# Altium PCB IOT_CPU_v0.PcbDoc (part 1 of 2)
Units mil, origin at the board's own origin, x right, y up, seen from the top; angles counter-clockwise.
Board outline 3866.14 x 1661.42 mil, 4 copper layers (Top Layer, Top, Bottom Layer, Bottom, Mid-Layer 2, GND, Mid-Layer 1, +3.3V); 132 components, 138 nets, 669 pads, 214 vias.
Unrouted connection lines stored in the file: 63.
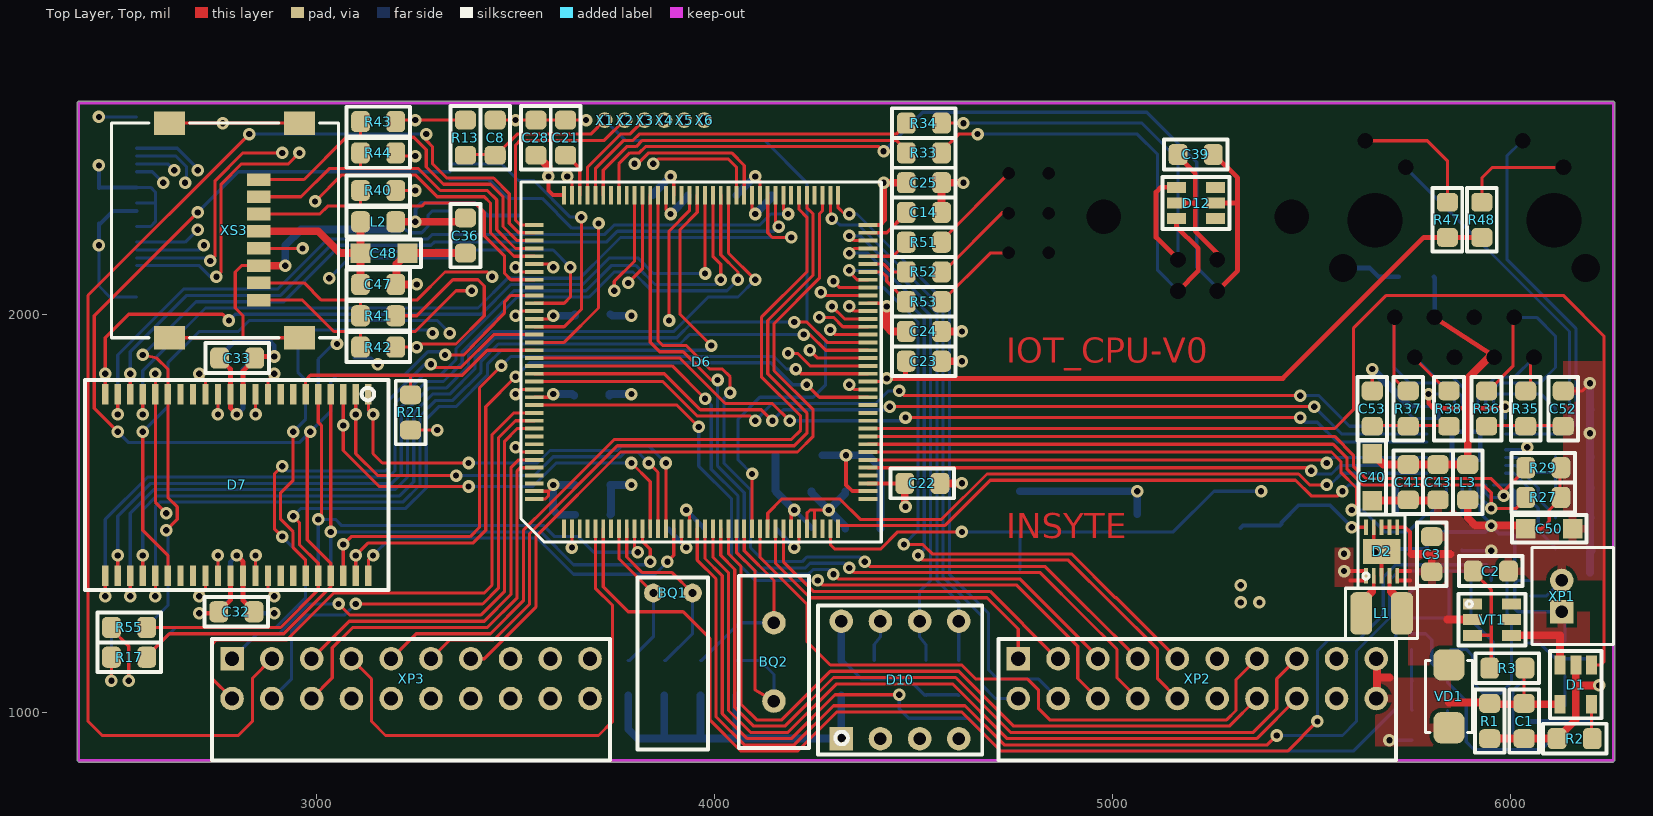
[diagram p0: Top Layer, Top view]
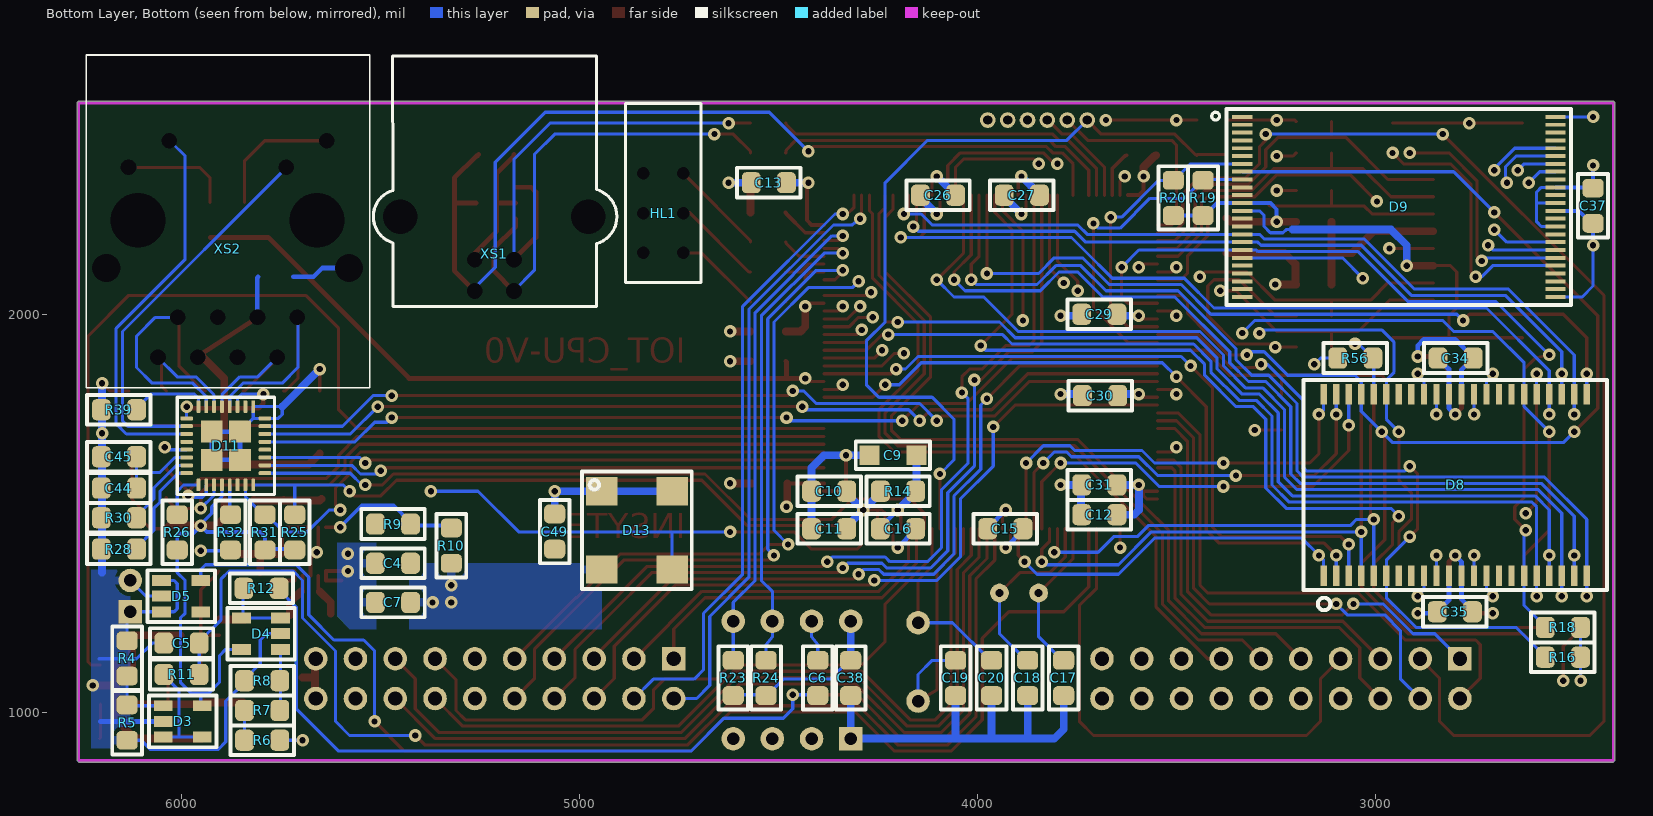
[diagram p1: Bottom Layer, Bottom view, seen from below]
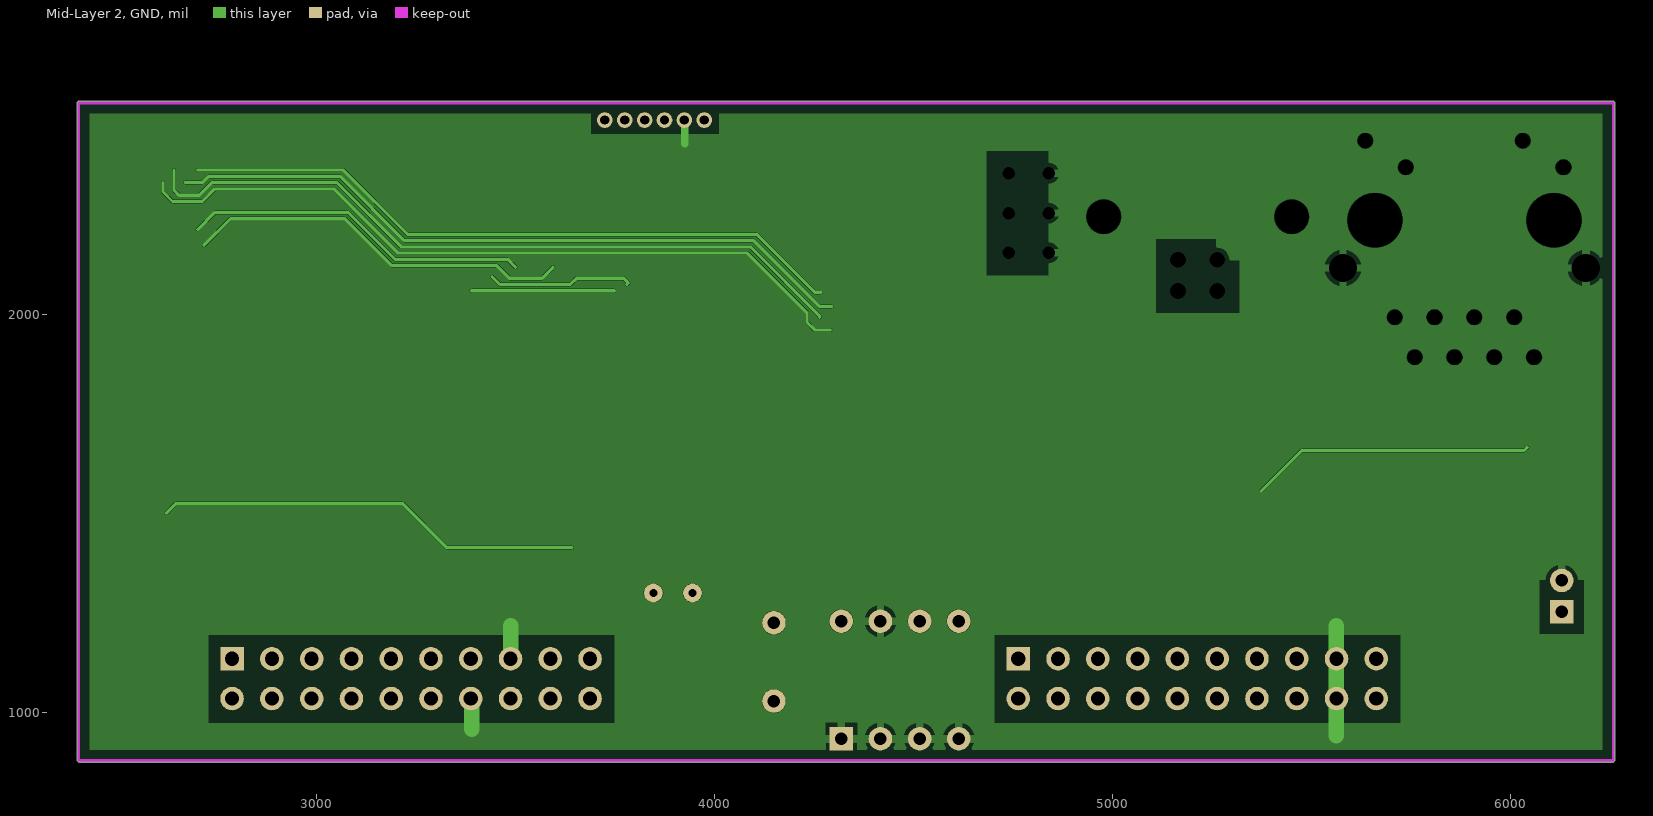
[diagram p2: Mid-Layer 2, GND]
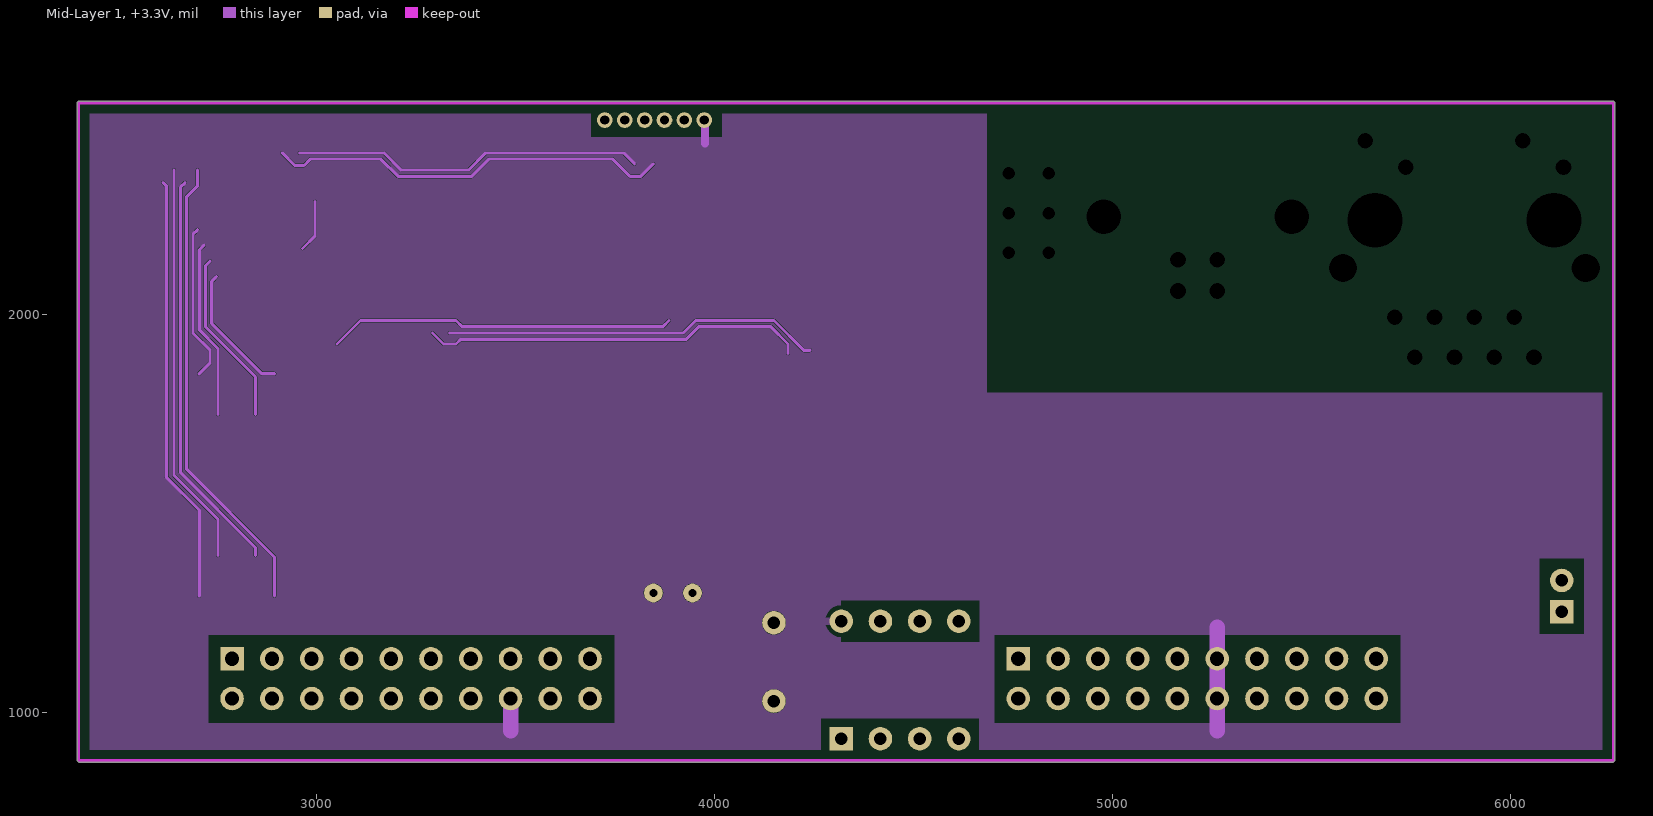
[diagram p3: Mid-Layer 1, +3.3V]

## Layer stack, top to bottom
Top Solder, Top Mask: solder mask 0.4, Solder Resist, Dk 3.5
Top Layer, Top: signal copper 1.4
Dielectric 1: dielectric 12.6, FR-4, Dk 4.8
Bottom Layer, Bottom: signal copper 1.4
Mid-Layer 2, GND: signal copper 1.4
Dielectric2: dielectric 12.6, FR-4, Dk 4.8
Mid-Layer 1, +3.3V: signal copper 1.4
Dielectric3: dielectric 12.6, FR-4, Dk 4.8
Bottom Solder, Bot Mask: solder mask 0.4, Solder Resist, Dk 3.5

## Board outline
2397.64,877.95 2401.57,874.02 6259.84,874.02 6263.78,877.95 6263.78,2531.5 6259.84,2535.43 2401.57,2535.43 2397.64,2531.5

## Design rules (kind name [scope] priority, off if disabled: settings)
Clearance "Clearance_Top Layer, Top" [ExistsOnLayer('Top Layer, Top') vs ExistsOnLayer('Top Layer, Top')] p1: gap=0.25 except(7.87: Arc-Arc Arc-Track Arc-THPad Arc-Via Track-Track Track-THPad Track-Via THPad-THPad THPad-Via Via-Via)
Clearance "Clearance_Bottom Layer, Bottom" [ExistsOnLayer('Bottom Layer, Bottom') vs ExistsOnLayer('Bottom Layer, Bottom')] p2: gap=0.25 except(7.87: Arc-Arc Arc-Track Arc-THPad Arc-Via Track-Track Track-THPad Track-Via THPad-THPad THPad-Via Via-Via)
Clearance "Clearance_Mid-Layer 2, GND" [ExistsOnLayer('Mid-Layer 2, GND') vs ExistsOnLayer('Mid-Layer 2, GND')] p3: gap=0.25 except(7.87: Arc-Arc Arc-Track Arc-THPad Arc-Via Track-Track Track-THPad Track-Via THPad-THPad THPad-Via Via-Via)
Clearance "Clearance_Mid-Layer 1, +3.3V" [ExistsOnLayer('Mid-Layer 1, +3.3V') vs ExistsOnLayer('Mid-Layer 1, +3.3V')] p4: gap=0.25 except(7.87: Arc-Arc Arc-Track Arc-THPad Arc-Via Track-Track Track-THPad Track-Via THPad-THPad THPad-Via Via-Via)
Clearance [All] p5: gap=0.25
ComponentClearance ComponentClearance_Design [All] p1: gap=0.5 collisioncheckmode=3 verticalgap=0.5 showdistances=FALSE
ComponentClearance [All] p2: gap=10 collisioncheckmode=3 verticalgap=10 showdistances=FALSE
PlaneClearance [All] p1: clearance=10
PolygonConnect PolygonConnect_18 [IsPolygon And InNet('+3,3V') And OnLayer('Mid-Layer 1, +3.3V') vs IsVia] p1: connectstyle=Direct reliefconductorwidth=15 reliefentries=4 polygonreliefangle="90 Angle" airgapwidth=10
PolygonConnect PolygonConnect_17 [IsPolygon And InNet('+3,3V') And OnLayer('Mid-Layer 1, +3.3V') vs IsPad] p2: connectstyle=Relief reliefconductorwidth=19.68 reliefentries=4 polygonreliefangle="90 Angle" airgapwidth=10
PolygonConnect PolygonConnect_16 [IsPolygon And InNet('GND') And OnLayer('Mid-Layer 2, GND') vs IsVia] p3: connectstyle=Direct reliefconductorwidth=15 reliefentries=4 polygonreliefangle="90 Angle" airgapwidth=10
PolygonConnect PolygonConnect_15 [IsPolygon And InNet('GND') And OnLayer('Mid-Layer 2, GND') vs IsPad] p4: connectstyle=Relief reliefconductorwidth=19.68 reliefentries=4 polygonreliefangle="90 Angle" airgapwidth=10
PolygonConnect PolygonConnect_14 [IsPolygon And InNet('GND') And OnLayer('Bottom Layer, Bottom') vs IsVia] p5: connectstyle=Direct reliefconductorwidth=15 reliefentries=4 polygonreliefangle="90 Angle" airgapwidth=10
PolygonConnect PolygonConnect_13 [IsPolygon And InNet('GND') And OnLayer('Bottom Layer, Bottom') vs IsPad] p6: connectstyle=Relief reliefconductorwidth=19.68 reliefentries=4 polygonreliefangle="90 Angle" airgapwidth=10
PolygonConnect PolygonConnect_12 [IsPolygon And InNet('+3,3V') And OnLayer('Bottom Layer, Bottom') vs IsVia] p7: connectstyle=Direct reliefconductorwidth=15 reliefentries=4 polygonreliefangle="90 Angle" airgapwidth=10
PolygonConnect PolygonConnect_11 [IsPolygon And InNet('+3,3V') And OnLayer('Bottom Layer, Bottom') vs IsPad] p8: connectstyle=Relief reliefconductorwidth=19.68 reliefentries=4 polygonreliefangle="90 Angle" airgapwidth=10
PolygonConnect PolygonConnect_10 [IsPolygon And InNet('GND') And OnLayer('Top Layer, Top') vs IsVia] p9: connectstyle=Direct reliefconductorwidth=15 reliefentries=4 polygonreliefangle="90 Angle" airgapwidth=10
PolygonConnect PolygonConnect_9 [IsPolygon And InNet('GND') And OnLayer('Top Layer, Top') vs IsPad] p10: connectstyle=Relief reliefconductorwidth=19.68 reliefentries=4 polygonreliefangle="90 Angle" airgapwidth=10
PolygonConnect PolygonConnect_8 [IsPolygon And InNet('+5V') And OnLayer('Top Layer, Top') vs IsVia] p11: connectstyle=Direct reliefconductorwidth=15 reliefentries=4 polygonreliefangle="90 Angle" airgapwidth=10
PolygonConnect PolygonConnect_7 [IsPolygon And InNet('+5V') And OnLayer('Top Layer, Top') vs IsPad] p12: connectstyle=Relief reliefconductorwidth=19.68 reliefentries=4 polygonreliefangle="90 Angle" airgapwidth=10
PolygonConnect PolygonConnect_6 [IsPolygon And InNet('NET00001') And OnLayer('Top Layer, Top') vs IsVia] p13: connectstyle=Direct reliefconductorwidth=15 reliefentries=4 polygonreliefangle="90 Angle" airgapwidth=10
PolygonConnect PolygonConnect_5 [IsPolygon And InNet('NET00001') And OnLayer('Top Layer, Top') vs IsPad] p14: connectstyle=Relief reliefconductorwidth=19.68 reliefentries=4 polygonreliefangle="90 Angle" airgapwidth=10
PolygonConnect PolygonConnect_4 [IsPolygon And InNet('NET00002') And OnLayer('Top Layer, Top') vs IsVia] p15: connectstyle=Direct reliefconductorwidth=15 reliefentries=4 polygonreliefangle="90 Angle" airgapwidth=10
PolygonConnect PolygonConnect_3 [IsPolygon And InNet('NET00002') And OnLayer('Top Layer, Top') vs IsPad] p16: connectstyle=Relief reliefconductorwidth=19.68 reliefentries=4 polygonreliefangle="90 Angle" airgapwidth=10
PolygonConnect PolygonConnect_2 [IsPolygon And InNet('+3,3V') And OnLayer('Top Layer, Top') vs IsVia] p17: connectstyle=Direct reliefconductorwidth=15 reliefentries=4 polygonreliefangle="90 Angle" airgapwidth=10
PolygonConnect PolygonConnect_1 [IsPolygon And InNet('+3,3V') And OnLayer('Top Layer, Top') vs IsPad] p18: connectstyle=Relief reliefconductorwidth=19.68 reliefentries=4 polygonreliefangle="90 Angle" airgapwidth=10
PolygonConnect [All] p19: connectstyle=Relief reliefconductorwidth=10 reliefentries=4 polygonreliefangle="90 Angle" airgapwidth=10
RoutingVias [All] p1: holewidth=28 width=50 viastyle="Through Hole" minholewidth=28 minwidth=50 maxholewidth=28 maxwidth=50
SolderMaskExpansion [All] p1: expansion=4
Width [All] p1: maxlimit=10 minlimit=10 preferedwidth=10
28 further rules are at their usual default settings.

## Components (designator, comment, footprint, x,y, rotation, side; value= is the part's Value field where it differs from the comment)
BQ1 "32,768кГц" DT38_Primary 3944.88,1299.21 r180 top
BQ2 "25МГц" HC49U_vert 4149.61,1224.41 r270 top
C1 "2,2" 0805 6035.43,933.07 r90 top
C2 "560" 0805 5996.06,1354.33 r180 top
C3 "10,0" 0805 5803.15,1440.94 r270 top
C4 "10,0" 0805 5425.2,1374.02 r0 bottom
C5 "560" 0805 5956.69,1173.23 r0 bottom
C6 "560" 0805 4401.57,1129.92 r270 bottom
C7 "10,0" 0805 5425.2,1275.59 r0 bottom
C8 "2,2" 0805 3448.82,2488.19 r270 top
C9 "22,0" TANTAL_A3216 4153.54,1645.67 r0 bottom
C10 "10,0" 0805 4417.32,1555.12 r180 bottom
C11 "0,1" 0805 4417.32,1460.63 r180 bottom
C12 "10,0" 0805 3649.61,1496.06 r0 bottom
C13 "10,0" 0805 4480.31,2330.71 r0 bottom
C14 "2,2" 0805 4570.87,2255.91 r180 top
C15 "0,1" 0805 3885.83,1460.63 r0 bottom
C16 "0,1" 0805 4244.09,1460.63 r180 bottom
C17 "22" 0805 3783.46,1129.92 r270 bottom
C18 "22" 0805 3874.02,1129.92 r270 bottom
C19 "22" 0805 4055.12,1129.92 r270 bottom
C20 "22" 0805 3964.57,1129.92 r270 bottom
C21 "2,2" 0805 3625.98,2488.19 r270 top
C22 "0,1" 0805 4566.93,1574.8 r180 top
C23 "0,1" 0805 4570.87,1881.89 r180 top
C24 "0,1" 0805 4570.87,1956.69 r180 top
C25 "0,1" 0805 4570.87,2330.71 r180 top
C26 "0,1" 0805 4055.12,2299.21 r0 bottom
C27 "0,1" 0805 3933.07,2299.21 r180 bottom
C28 "0,1" 0805 3551.18,2488.19 r270 top
C29 "0,1" 0805 3649.61,2000 r0 bottom
C30 "0,1" 0805 3736.22,1795.28 r180 bottom
C31 "0,1" 0805 3649.61,1570.87 r0 bottom
C32 "0,1" 0805 2842.52,1251.97 r180 top
C33 "0,1" 0805 2755.91,1889.76 r0 top
C34 "0,1" 0805 2842.52,1889.76 r180 bottom
C35 "0,1" 0805 2755.91,1251.97 r0 bottom
C36 "0,1" 0805 3374.02,2153.54 r90 top
C37 "0,1" 0805 2452.76,2228.35 r90 bottom
C38 "0,1" 0805 4318.9,1129.92 r270 bottom
C39 "0,1" 0805 5165.35,2401.57 r0 top
C40 "22,0" TANTAL_A3216 5653.54,1649.61 r270 top
C41 "2,2" 0805 5744.09,1622.05 r270 top
C43 "0,1" 0805 5818.9,1622.05 r270 top
C44 "0,1" 0805 6114.17,1562.99 r0 bottom
C45 "2,2" 0805 6114.17,1641.73 r0 bottom
C47 "0,1" 0805 3110.24,2074.8 r0 top
C48 "22,0" TANTAL_A3216 3110.24,2153.54 r0 top
C49 "0,1" 0805 5062.99,1409.45 r90 bottom
C50 "22,0" TANTAL_A3216 6039.37,1460.63 r0 top
C52 "0,1" 0805 6133.86,1807.09 r270 top
C53 "0,1" 0805 5653.54,1807.09 r270 top
D1 "{Value}" SOT-23-5 6204.72,1118.11 r270 top
D2 "{Value}" VSON-10 5637.8,1342.52 r90 top
D3 "{Value}" SOT-23-5 6047.24,1015.75 r180 bottom
D4 "{Value}" SOT-23-5 5751.97,1157.48 r0 bottom
D5 "{Value}" SOT-23-5 6051.18,1330.71 r180 bottom
D6 "" LQFP-144 3622.05,1460.63 r90 top
D7 "{Value}" TSOP-44 3129.92,1799.21 r270 top
D8 "{Value}" TSOP-44 3129.92,1342.52 r90 bottom
D9 "{Value}" TSSOP2-48 3334.65,2496.06 r180 bottom
D10 "DIP socket 1-2199298-2" DIP-08 4318.9,933.07 r90 top
D11 "{Value}" QFN-32-5X5 5889.76,1669.29 r180 bottom
D12 "{Value}" SOT-23-6 5161.42,2318.9 r0 top
D13 "" SG0705 4944.88,1555.12 r270 bottom
HL1 "" L-7104SA-3GD 4740.16,2354.33 r270 bottom
L1 "3,3мкГн" SRN3015 5728.35,1248.03 r180 top
L2 "BLM21BD601SN1D" 0805 3110.24,2232.28 r0 top
L3 "BLM21BD601SN1D" 0805 5893.7,1622.05 r270 top
R1 "100к" 0805 5948.82,933.07 r90 top
R2 "10к" 0805 6118.11,933.07 r0 top
R3 "10к" 0805 5948.82,1110.24 r0 top
R4 "1M" 0805 6137.8,1090.55 r90 bottom
R5 "1M" 0805 6137.8,929.13 r90 bottom
R6 "1M" 0805 5842.52,929.13 r180 bottom
R7 "1M" 0805 5842.52,1003.94 r180 bottom
R8 "1M" 0805 5842.52,1078.74 r180 bottom
R9 "1M" 0805 5425.2,1472.44 r0 bottom
R10 "180к" 0805 5322.83,1374.02 r90 bottom
R11 "620" 0805 5956.69,1094.49 r0 bottom
R12 "620" 0805 5755.91,1311.02 r0 bottom
R13 "10к" 0805 3374.02,2488.19 r270 top
R14 "22" 0805 4244.09,1555.12 r180 bottom
R16 "10к" 0805 2484.25,1137.8 r0 bottom
R17 "10к" 0805 2484.25,1137.8 r0 top
R18 "10к" 0805 2484.25,1212.6 r0 bottom
R19 "10к" 0805 3433.07,2248.03 r90 bottom
R20 "10к" 0805 3507.87,2248.03 r90 bottom
R21 "10к" 0805 3236.22,1708.66 r90 top
R23 "3,3к" 0805 4614.17,1129.92 r270 bottom
R24 "3,3к" 0805 4531.5,1129.92 r270 bottom
R25 "3,3к" 0805 5716.54,1496.06 r270 bottom
R26 "10к" 0805 6011.81,1496.06 r270 bottom
R27 "10к" 0805 6039.37,1539.37 r0 top
R28 "10к" 0805 6114.17,1409.45 r0 bottom
R29 "10к" 0805 6039.37,1614.17 r0 top
R30 "10к" 0805 6114.17,1488.19 r0 bottom
R31 "10к" 0805 5791.34,1496.06 r270 bottom
R32 "10к" 0805 5877.95,1496.06 r270 bottom
R33 "22" 0805 4570.87,2405.51 r180 top
R34 "22" 0805 4570.87,2480.32 r180 top
R35 "49,9" 0805 6039.37,1807.09 r270 top
R36 "49,9" 0805 5940.94,1807.09 r270 top
R37 "49,9" 0805 5744.09,1807.09 r270 top
R38 "49,9" 0805 5846.46,1807.09 r270 top
R39 "12,1к" 0805 6114.17,1759.84 r0 bottom
R40 "10к" 0805 3110.24,2311.02 r0 top
R41 "10к" 0805 3110.24,1996.06 r0 top
R42 "10к" 0805 3110.24,1917.32 r0 top
R43 "10к" 0805 3110.24,2484.25 r0 top
R44 "1M" 0805 3110.24,2405.51 r0 top
R47 "620" 0805 5842.52,2192.91 r90 top
R48 "620" 0805 5929.13,2192.91 r90 top
R51 "620" 0805 4570.87,2181.1 r180 top
R52 "620" 0805 4570.87,2106.3 r180 top
R53 "620" 0805 4570.87,2031.5 r180 top
R55 "10к" 0805 2484.25,1212.6 r0 top
R56 "10к" 0805 3094.49,1889.76 r180 bottom
VD1 "{Value}" SMA_MBRA340T3G(Primary) 5846.46,1118.11 r270 top
VT1 "{Value}" SOT-23-6 5905.51,1271.65 r0 top
X1 "" 01_Primary 3724.41,2488.19 r0 top locked
X2 "" 01_Primary 3774.41,2488.19 r0 top locked
X3 "" 01_Primary 3824.41,2488.19 r0 top locked
X4 "" 01_Primary 3874.41,2488.19 r0 top locked
X5 "" 01_Primary 3924.41,2488.19 r0 top locked
X6 "" 01_Primary 3974.41,2488.19 r0 top locked
XP1 "{Value}" DS1066-02M 6129.92,1251.97 r90 top
XP2 "{Value}" PLD-20R 4763.78,1133.86 r0 top
XP3 "{Value}" PLD-20R 2787.4,1133.86 r0 top
XS1 "" USB-B 5263.78,2059.06 r270 bottom
XS2 "" LU1T516-43 6110.24,2236.22 r180 bottom
XS3 "{Value}" 47219-2001 2854.33,2338.58 r90 top

## Footprints (in the part's own frame and the unit in brackets; to place one, negate y for a bottom-side part, rotate by r counter-clockwise, add the part's x,y. Pads: shape width x height; smd on the part's side, far side on the other; paste and mask are expansions set on the pad)
01_Primary [mm]
  round 1 hole 0.6: 1(0,0)
0805 [mm]
  rrect50% 1.2x1.35 smd: 1(0,0) 2(2.25,0)
  silkscreen extent -0.9,-0.95 3.15,0.95
47219-2001 [mm]
  rect 0.8x1.5 smd: 1(0,0) 2(-1.1,0) 3(-2.2,0) 4(-3.3,0) 5(-4.4,0) 6(-5.5,0) 7(-6.6,0) 8(-7.7,0)
  rect 1.5x2 smd: 9(-10.1,-2.6) 10(3.6,-2.6) 11(3.6,5.7) 12(-10.1,5.7)
  silkscreen extent -10.1,-5.1 3.6,9.4
DIP-08 [mm]
  rect 1.5x1.5 hole 0.8: 1(0,0)
  round 1.5 hole 0.8: 2(0,-2.5) 3(0,-5) 4(0,-7.5) 5(7.5,-7.5) 6(7.5,-5) 7(7.5,-2.5) 8(7.5,0)
  silkscreen extent -1,-9 8.5,1.5
DS1066-02M [mm]
  rect 1.5x1.5 hole 0.8: 1(0,0)
  round 1.5 hole 0.8: 2(2,0)
  silkscreen extent -2.1,-3.3 4.1,1.9
DT38_Primary [mm]
  round 1.2 hole 0.5: 1(0,0) 2(2.5,0)
  silkscreen extent -1,-1 3.5,10
HC49U_vert [mm]
  round 1.5 hole 0.8: 1(0,0) 2(5,0)
  silkscreen extent -3,-2.25 8,2.25
L-7104SA-3GD [mm]
  round 0 hole 0.8: 1(0,0) 2(0,-2.54) 3(2.54,0) 4(2.54,-2.54) 5(5.08,0) 6(5.08,-2.54)
  silkscreen extent -4.45,-3.68 6.98,1.14
LQFP-144 [mm]
  rect 1.2x0.25 smd: 1(0,0) 2(0,-0.5) 3(0,-1) 4(0,-1.5) 5(0,-2) 6(0,-2.5) 7(0,-3) 8(0,-3.5) 9(0,-4) 10(0,-4.5) 11(0,-5) 12(0,-5.5) 13(0,-6) 14(0,-6.5) 15(0,-7) 16(0,-7.5) 17(0,-8) 18(0,-8.5) 19(0,-9) 20(0,-9.5) 21(0,-10) 22(0,-10.5) 23(0,-11) 24(0,-11.5) 25(0,-12) 26(0,-12.5) 27(0,-13) 28(0,-13.5) 29(0,-14) 30(0,-14.5) 31(0,-15) 32(0,-15.5) 33(0,-16) 34(0,-16.5) 35(0,-17) 36(0,-17.5) 73(21.3,-17.5) 74(21.3,-17) 75(21.3,-16.5) 76(21.3,-16) 77(21.3,-15.5) 78(21.3,-15) 79(21.3,-14.5) 80(21.3,-14) 81(21.3,-13.5) 82(21.3,-13) 83(21.3,-12.5) 84(21.3,-12) 85(21.3,-11.5) 86(21.3,-11) 87(21.3,-10.5) 88(21.3,-10) 89(21.3,-9.5) 90(21.3,-9) 91(21.3,-8.5) 92(21.3,-8) 93(21.3,-7.5) 94(21.3,-7) 95(21.3,-6.5) 96(21.3,-6) 97(21.3,-5.5) 98(21.3,-5) 99(21.3,-4.5) 100(21.3,-4) 101(21.3,-3.5) 102(21.3,-3) 103(21.3,-2.5) 104(21.3,-2) 105(21.3,-1.5) 106(21.3,-1) 107(21.3,-0.5) 108(21.3,0)
  rect 0.25x1.2 smd: 37(1.9,-19.4) 38(2.4,-19.4) 39(2.9,-19.4) 40(3.4,-19.4) 41(3.9,-19.4) 42(4.4,-19.4) 43(4.9,-19.4) 44(5.4,-19.4) 45(5.9,-19.4) 46(6.4,-19.4) 47(6.9,-19.4) 48(7.4,-19.4) 49(7.9,-19.4) 50(8.4,-19.4) 51(8.9,-19.4) 52(9.4,-19.4) 53(9.9,-19.4) 54(10.4,-19.4) 55(10.9,-19.4) 56(11.4,-19.4) 57(11.9,-19.4) 58(12.4,-19.4) 59(12.9,-19.4) 60(13.4,-19.4) 61(13.9,-19.4) 62(14.4,-19.4) 63(14.9,-19.4) 64(15.4,-19.4) 65(15.9,-19.4) 66(16.4,-19.4) 67(16.9,-19.4) 68(17.4,-19.4) 69(17.9,-19.4) 70(18.4,-19.4) 71(18.9,-19.4) 72(19.4,-19.4) 109(19.4,1.9) 110(18.9,1.9) 111(18.4,1.9) 112(17.9,1.9) 113(17.4,1.9) 114(16.9,1.9) 115(16.4,1.9) 116(15.9,1.9) 117(15.4,1.9) 118(14.9,1.9) 119(14.4,1.9) 120(13.9,1.9) 121(13.4,1.9) 122(12.9,1.9) 123(12.4,1.9) 124(11.9,1.9) 125(11.4,1.9) 126(10.9,1.9) 127(10.4,1.9) 128(9.9,1.9) 129(9.4,1.9) 130(8.9,1.9) 131(8.4,1.9) 132(7.9,1.9) 133(7.4,1.9) 134(6.9,1.9) 135(6.4,1.9) 136(5.9,1.9) 137(5.4,1.9) 138(4.9,1.9) 139(4.4,1.9) 140(3.9,1.9) 141(3.4,1.9) 142(2.9,1.9) 143(2.4,1.9) 144(1.9,1.9)
  silkscreen extent -0.85,-20.25 22.15,2.75
LU1T516-43 [mm]
  round 0 hole 1: 1(10.16,-6.2) 2(8.89,-8.74) 3(7.62,-6.2) 4(6.35,-8.74) 5(5.08,-6.2) 6(3.81,-8.74) 7(2.54,-6.2) 8(1.27,-8.74) 9(12.04,5.08) 10(9.45,3.38) 11(1.98,5.08) 12(-0.61,3.378)
  round 0 hole 3.5 unplated: 13(11.43,0) 14(0,0)
  round 0 hole 1.8: 15(13.462,-3.048) 16(-2.032,-3.048)
  silkscreen extent -3.32,-10.7 14.78,10.55
PLD-20R [mm]
  rect 1.5x1.5 hole 0.9: 1(0,0)
  round 1.5 hole 0.9: 2(0,-2.54) 3(2.54,0) 4(2.54,-2.54) 5(5.08,0) 6(5.08,-2.54) 7(7.62,0) 8(7.62,-2.54) 9(10.16,0) 10(10.16,-2.54) 11(12.7,0) 12(12.7,-2.54) 13(15.24,0) 14(15.24,-2.54) 15(17.78,0) 16(17.78,-2.54) 17(20.32,0) 18(20.32,-2.54) 19(22.86,0) 20(22.86,-2.54)
  silkscreen extent -1.27,-6.48 24.13,1.27
QFN-32-5X5 [mm]
  rrect50% 0.8x0.25 smd: 1(-2.5,1.75) 2(-2.5,1.25) 3(-2.5,0.75) 4(-2.5,0.25) 5(-2.5,-0.25) 6(-2.5,-0.75) 7(-2.5,-1.25) 8(-2.5,-1.75) 17(2.5,-1.75) 18(2.5,-1.25) 19(2.5,-0.75) 20(2.5,-0.25) 21(2.5,0.25) 22(2.5,0.75) 23(2.5,1.25) 24(2.5,1.75)
  rrect50% 0.25x0.8 smd: 9(-1.75,-2.5) 10(-1.25,-2.5) 11(-0.75,-2.5) 12(-0.25,-2.5) 13(0.25,-2.5) 14(0.75,-2.5) 15(1.25,-2.5) 16(1.75,-2.5) 25(1.75,2.5) 26(1.25,2.5) 27(0.75,2.5) 28(0.25,2.5) 29(-0.25,2.5) 30(-0.75,2.5) 31(-1.25,2.5) 32(-1.75,2.5)
  rect 1.4x1.4 smd: 33(0.9,0.9) 34(0.9,-0.9) 35(-0.9,0.9) 36(-0.9,-0.9)
  silkscreen extent -3.1,-3.1 3.1,3.1
SG0705 [mm]
  rect 1.8x2 smd: 1(0,0) 2(5,0) 3(5,4.5) 4(0,4.5)
  silkscreen extent -1.25,-1.25 6.25,5.75
SMA_MBRA340T3G(Primary) [mm]
  rrect50% 2x2 smd: A(4,0) K(0,0)
  silkscreen extent -0.3,-1.5 4.3,1.5
SOT-23-5 [mm]
  rect 1.2x0.7 smd: 1(0,0) 2(0,-1) 3(0,-2) 4(2.5,-2) 5(2.5,0)
  silkscreen extent -0.9,-2.65 3.4,0.65
SOT-23-6 [mm]
  rect 1.2x0.7 smd: 1(0,0) 2(0,-1) 3(0,-2) 4(2.5,-2) 5(2.5,-1) 6(2.5,0)
  silkscreen extent -0.9,-2.65 3.4,0.65
SRN3015 [mm]
  rrect50% 1.4x2.7 smd: 1(0,0) 2(2.6,0)
  silkscreen extent -1,-1.6 3.6,1.6
TANTAL_A3216 [mm]
  rect 1.25x1.25 smd: 1(0,0) 2(3,0)
  silkscreen extent -0.87,-0.87 3.88,0.87
TSOP-44 [mm]
  rect 1.3x0.4 smd: 1(0,0) 2(0,-0.8) 3(0,-1.6) 4(0,-2.4) 5(0,-3.2) 6(0,-4) 7(0,-4.8) 8(0,-5.6) 9(0,-6.4) 10(0,-7.2) 11(0,-8) 12(0,-8.8) 13(0,-9.6) 14(0,-10.4) 15(0,-11.2) 16(0,-12) 17(0,-12.8) 18(0,-13.6) 19(0,-14.4) 20(0,-15.2) 21(0,-16) 22(0,-16.8) 23(11.6,-16.8) 24(11.6,-16) 25(11.6,-15.2) 26(11.6,-14.4) 27(11.6,-13.6) 28(11.6,-12.8) 29(11.6,-12) 30(11.6,-11.2) 31(11.6,-10.4) 32(11.6,-9.6) 33(11.6,-8.8) 34(11.6,-8) 35(11.6,-7.2) 36(11.6,-6.4) 37(11.6,-5.6) 38(11.6,-4.8) 39(11.6,-4) 40(11.6,-3.2) 41(11.6,-2.4) 42(11.6,-1.6) 43(11.6,-0.8) 44(11.6,0)
  silkscreen extent -0.9,-18.1 12.5,1.3
TSSOP2-48 [mm]
  rect 1.3x0.25 smd: 1(0,0) 2(0,-0.5) 3(0,-1) 4(0,-1.5) 5(0,-2) 6(0,-2.5) 7(0,-3) 8(0,-3.5) 9(0,-4) 10(0,-4.5) 11(0,-5) 12(0,-5.5) 13(0,-6) 14(0,-6.5) 15(0,-7) 16(0,-7.5) 17(0,-8) 18(0,-8.5) 19(0,-9) 20(0,-9.5) 21(0,-10) 22(0,-10.5) 23(0,-11) 24(0,-11.5) 25(20,-11.5) 26(20,-11) 27(20,-10.5) 28(20,-10) 29(20,-9.5) 30(20,-9) 31(20,-8.5) 32(20,-8) 33(20,-7.5) 34(20,-7) 35(20,-6.5) 36(20,-6) 37(20,-5.5) 38(20,-5) 39(20,-4.5) 40(20,-4) 41(20,-3.5) 42(20,-3) 43(20,-2.5) 44(20,-2) 45(20,-1.5) 46(20,-1) 47(20,-0.5) 48(20,0)
  silkscreen extent -1.95,-12 21,0.5
USB-B [mm]
  round 0 hole 1: 1(0.02,0) 2(0.02,2.5) 3(-1.98,2.5) 4(-1.98,0)
  round 0 hole 2.2: 5(-4.73,7.25) 6(-4.73,-4.75)
  silkscreen extent -14.98,-6.48 1.01,9.07
VSON-10 [mm]
  rect 1x0.25 smd: 1(0,0) 2(0,-0.5) 3(0,-1) 4(0,-1.5) 5(0,-2) 6(3.1,-2) 7(3.1,-1.5) 8(3.1,-1) 9(3.1,-0.5) 10(3.1,0)
  rect 1.6x2.4 smd: 11(1.55,-1)
  silkscreen extent -0.8,-2.5 3.9,0.5

## Part data
BQ1 BQ2: "РЕЗОНАТОР"
C1 C2 C3 C4 C5 C6 C7 C8 C9 C10 C11 C12 C13 C14 C15 C16 C17 C18 C19 C20 C21 C22 C23 C24 C25 C26 C27 C28 C29 C30 C31 C32 C33 C34 C35 C36 C37 C38 C39 C40 C41 C43 C44 C45 C47 C48 C49 C50 C52 C53: "КОНДЕНСАТОР"
D1 D2 D3 D4 D5 D7 D8 D9 D10 D11 D12 D13 HL1 L1 L2 L3 VD1 VT1 XP1 XP2 XP3 XS3: "{Description}"
R1 R2 R3 R4 R5 R6 R7 R8 R9 R10 R11 R12 R13 R14 R16 R17 R18 R19 R20 R21 R23 R24 R25 R26 R27 R28 R29 R30 R31 R32 R33 R34 R35 R36 R37 R38 R39 R40 R41 R42 R43 R44 R47 R48 R51 R52 R53 R55 R56: "РЕЗИСТОР"
X1 X2 X3 X4 X5 X6: "КОНТАКТ"
XS1 XS2: "РОЗЕТКА"

## Via types
v1: diameter 31.5, hole 15.75, Top Layer, Top to Bottom Layer, Bottom, 214 vias

## Nets (pads, with @x,y where several pads share a name; then routed paths per layer and width w, separated by ;. In a path a pad name is that pad's centre, name@x,y a point inside that pad or via, vN(x,y) a via of type N, cw(c..) or ccw(c..) an arc to the next point about the centre after c; other vN are vias at no path point)
5VDET: C6.2 D6.19 R12.1 | length 2737
  Top Layer, Top w7.87: D6.19@3976.38,1460.63 3976.38,1385.83 4019.68,1342.52 4019.68,996.06 4082.68,933.07 4192.91,933.07 4303.15,1043.31 v1(4464.57,1043.31)
  Bottom Layer, Bottom w7.87: C6.2@4419.29,1043.31 v1(4464.57,1043.31) 4464.57,1007.87 4488.19,984.25 4637.8,984.25 4720.47,901.57 5606.3,901.57 5712.6,1007.87 5712.6,1263.78 5755.91,1307.09 R12.1@5755.91,1311.02
+1,8V: D5.5 D6.6 | length 3136.3
  Top Layer, Top w7.87: D6.6@3720.47,1460.63 3720.47,1314.96 3783.46,1251.97 3921.26,1251.97 3988.19,1185.04 3988.19,980.32 4066.93,901.57 4208.66,901.57 4307.09,1000 4622.05,1000 4720.47,901.57 5440.94,901.57 v1(5515.75,976.38)
  Bottom Layer, Bottom w7.87: v1(5515.75,976.38) 5515.75,1153.54 5543.31,1181.1 5618.11,1181.1 5681.1,1244.09 5681.1,1338.58 5712.6,1370.08 5940.94,1370.08 5952.76,1358.27 D5.5@5952.76,1330.71
+3,3V: C4.2 C7.2 C9.1 C12.1 C13.1 C15.2 C16.1 C22.2 C23.2 C24.2 C25.2 C26.2 C27.1 C28.2 C29.1 C30.2 C31.1 C32.2 C33.2 C34.2 C35.2 C36.2 C37.2 C38.1 C49.2 C50.1 D2.1 D3.5 D4.5 D6.17 D6.30 D6.39 D6.52 D6.62 D6.72 D6.84 D6.95 D6.108 D6.121 D6.131 D6.143 D6.144 D7.11 D7.33 D8.11 D8.33 D9.12 D9.19 D9.34 D9.37 D9.39 D10.8 D11.12 D13.1 D13.4 L2.2 L3.2 R9.2 R13.1 R14.2 R16.1 R17.1 R18.1 R19.1 R20.1 R21.1 R23.2 R24.2 R25.2 R26.2 R27.2 R29.2 R31.2 R40.2 R41.2 R42.2 R43.2 R47.1 R48.1 X6.1 XP2.11 XP2.12 XP3.16 | length 9464.4
  Top Layer, Top w7.87: v1(2484.25,1078.74) R17.1@2484.25,1137.8 ; R42.2@3198.82,1917.32 v1(3251.97,1917.32) 3259.84,1925.2 3350.39,1925.2 3421.26,1996.06 3421.26,2070.87 3405.51,2086.61 3342.52,2086.61 3251.97,1996.06 R41.2@3198.82,1996.06 ; R40.2@3198.82,2311.02 v1(3248.03,2311.02) ; R43.2@3198.82,2484.25 3202.76,2488.19 v1(3248.03,2488.19) R13.1@3374.02,2488.19 ; R21.1@3236.22,1708.66 v1(3303.15,1708.66) ; D6.144@3547.24,1535.43 3574.8,1535.43 3582.68,1543.31 3582.68,1555.12 ; D6.143@3547.24,1555.12 3582.68,1555.12 ; D6.131@3547.24,1791.34 3586.61,1791.34 v1(3594.49,1799.21) ; D6.121@3547.24,1988.19 3586.61,1988.19 v1(3594.49,1996.06) ; v1(3594.49,1570.87) 3594.49,1566.93 3582.68,1555.12 ; D6.95@3877.95,2299.21 3877.95,2263.78 v1(3889.76,2251.97) ; v1(3929.13,1507.87) 3937.01,1500 D6.17@3937.01,1460.63 ; D6.84@4094.49,2299.21 4094.49,2259.84 v1(4102.36,2251.97) ; D6.30@4192.91,1460.63 4192.91,1500 v1(4200.79,1507.87) ; D6.52@4385.83,1830.71 4425.2,1830.71 v1(4433.07,1838.58) ; D6.62@4385.83,2027.56 4425.2,2027.56 v1(4433.07,2019.68) ; C50.1@6039.37,1460.63 6078.74,1460.63 6098.43,1480.32 6098.43,1507.87 6125.98,1535.43 6125.98,1537.4 R27.2@6127.95,1539.37 6125.98,1541.34 6125.98,1612.2 R29.2@6127.95,1614.17
  Top Layer, Top w9.84: v1(3582.68,2346.46) 3582.68,2311.02 3594.49,2299.21 D6.108@3622.05,2299.21 ; D6.39@4385.83,1574.8 C22.2@4478.35,1574.8 ; D6.72@4385.83,2224.41 4417.32,2224.41 4429.13,2236.22 4429.13,2326.77 v1(4425.2,2330.71) ; v1(5582.68,1354.33) 5637.8,1354.33 D2.1@5637.8,1342.52 5637.8,1330.71 5598.43,1330.71
  Top Layer, Top w11.81: v1(2704.72,1248.03) 2750,1248.03 C32.2@2753.94,1251.97 2783.46,1281.5 D7.33@2783.46,1342.52 ; D7.11@2814.96,1799.21 2814.96,1858.27 2842.52,1885.83 2842.52,1887.8 C33.2@2844.49,1889.76 2848.43,1893.7 v1(2893.7,1893.7) ; v1(4433.07,1838.58) 4480.31,1838.58 ; C23.2@4482.28,1881.89 4480.31,1879.92 4480.31,1838.58 ; R48.1@5929.13,2192.91 R47.1@5842.52,2192.91 5783.46,2192.91 5429.13,1838.58 4480.31,1838.58
  Top Layer, Top w19.68: L2.2@3198.82,2232.28 v1(3248.03,2232.28) 3364.17,2232.28 C36.2@3374.02,2242.13 ; C28.2@3551.18,2399.61 3553.15,2397.64 3555.12,2397.64 3582.68,2370.08 v1(3582.68,2346.46) ; v1(4425.2,2330.71) C25.2@4482.28,2330.71 ; v1(4433.07,2019.68) 4433.07,1968.5 4444.88,1956.69 C24.2@4482.28,1956.69 ; C22.2@4478.35,1574.8 4478.35,1517.72 v1(4480.31,1515.75) ; L3.2@5893.7,1533.46 5893.7,1488.19 5913.39,1468.5 v1(5952.76,1468.5) 6031.5,1468.5 C50.1@6039.37,1460.63
  Mid-Layer 1, +3.3V w19.68: X6.1@3974.41,2488.19 3976.38,2486.22 3976.38,2429.13
  Mid-Layer 1, +3.3V w39.37: XP3.16@3487.4,1033.86 3488.19,1033.07 3488.19,952.76 ; 5263.78,952.76 XP2.12@5263.78,1033.86 XP2.11@5263.78,1133.86 5263.78,1212.6
  Bottom Layer, Bottom w7.87: v1(2484.25,1078.74) R16.1@2484.25,1137.8 R18.1@2484.25,1212.6 ; D9.34@2547.24,2220.47 2582.68,2220.47 2594.49,2232.28 2594.49,2279.53 ; D9.37@2547.24,2279.53 2594.49,2279.53 ; D9.39@2547.24,2318.9 2582.68,2318.9 2594.49,2307.09 2594.49,2279.53 ; v1(3031.5,2090.55) 3082.68,2141.73 D9.19@3334.65,2141.73 ; C38.1@4318.9,1129.92 4322.83,1129.92 4370.08,1082.68 4488.19,1082.68 4527.56,1043.31 4529.53,1043.31 R24.2@4531.5,1041.34 4533.46,1043.31 4612.2,1043.31 R23.2@4614.17,1041.34 ; D4.5@5850.39,1157.48 5889.76,1157.48 5905.51,1141.73 5905.51,1074.8 5933.07,1047.24 5952.76,1047.24 ; D11.12@5899.61,1570.87 5899.61,1541.34 5925.2,1515.75 5925.2,1500 5952.76,1472.44 v1(5952.76,1468.5) ; D3.5@5948.82,1015.75 5952.76,1019.68 5952.76,1047.24 ; R26.2@6011.81,1409.45 R26.2@6011.81,1407.48 6011.81,1350.39 5992.13,1330.71 5992.13,1248.03 6003.94,1236.22 6003.94,1074.8 5976.38,1047.24 5952.76,1047.24
  Bottom Layer, Bottom w9.84: v1(2452.76,2374.02) C37.2@2452.76,2316.93 2454.72,2318.9 D9.39@2547.24,2318.9 ; v1(3248.03,2232.28) 3248.03,2263.78 3263.78,2279.53 D9.12@3334.65,2279.53 3397.64,2279.53 3429.13,2248.03 R19.1@3433.07,2248.03 R20.1@3507.87,2248.03 ; R25.2@5716.54,1407.48 5718.5,1409.45 5789.37,1409.45 R31.2@5791.34,1407.48 5791.34,1440.94 5803.15,1452.76 5937.01,1452.76 v1(5952.76,1468.5) 5972.44,1448.82 6003.94,1448.82 6011.81,1440.94 R26.2@6011.81,1409.45
  Bottom Layer, Bottom w11.81: D8.33@2783.46,1799.21 2783.46,1860.24 C34.2@2753.94,1889.76 2755.91,1891.73 2755.91,1893.7 2799.21,1937.01 2877.95,1937.01 2893.7,1921.26 v1(2893.7,1893.7) ; D8.11@2814.96,1342.52 2814.96,1281.5 C35.2@2844.49,1251.97 2848.43,1248.03 v1(2893.7,1248.03) ; v1(3929.13,1507.87) 3972.44,1464.57 3972.44,1462.6 C15.2@3974.41,1460.63 ; v1(4200.79,1507.87) 4244.09,1464.57 C16.1@4244.09,1460.63
  Bottom Layer, Bottom w19.68: v1(3594.49,1799.21) 3641.73,1799.21 C30.2@3647.64,1795.28 ; v1(3594.49,1996.06) 3649.61,1996.06 C29.1@3649.61,2000 ; C12.1@3649.61,1496.06 3606.3,1496.06 3594.49,1507.87 v1(3594.49,1570.87) C31.1@3649.61,1570.87 ; v1(3889.76,2251.97) 3933.07,2295.28 C27.1@3933.07,2299.21 ; v1(4102.36,2251.97) 4143.7,2293.31 C26.2@4143.7,2299.21 ; C9.1@4153.54,1645.67 4153.54,1557.09 R14.2@4155.51,1555.12 4155.51,1553.15 v1(4200.79,1507.87) ; C38.1@4318.9,1129.92 D10.8@4318.9,1228.35 ; v1(4425.2,2330.71) C13.1@4480.31,2330.71 ; D13.4@4767.72,1555.12 D13.1@4944.88,1555.12 v1(5062.99,1555.12) C49.2@5062.99,1498.03
  other v1: 5582.68,1397.64
+5V: C1.2 D1.4 R1.2 R3.2 R6.2 VD1.A XP2.19 XP2.20 | length 561.7
  Top Layer, Top w7.87: C1.2@6035.43,1021.65 6035.43,1106.3 R3.2@6037.4,1110.24
  Top Layer, Top w19.68: XP2.20@5663.78,1033.86 5665.35,1035.43 5665.35,1086.61 ; XP2.19@5663.78,1133.86 5665.35,1132.28 5665.35,1086.61 ; 5696.85,1086.61 5665.35,1086.61 ; 5846.46,1023.62 5946.85,1023.62 5950.79,1019.68 6033.46,1019.68 C1.2@6035.43,1021.65 6037.4,1019.68 D1.4@6125.98,1019.68
  Bottom Layer, Bottom w7.87: v1(5696.85,929.13) R6.2@5753.94,929.13
A0: D6.10 D7.5 D8.5 | length 1362.9
  Top Layer, Top w7.87: v1(3003.94,1484.25) 3011.81,1492.13 3011.81,1720.47 3003.94,1728.35 D7.5@3003.94,1799.21 ; D6.10@3799.21,1460.63 3799.21,1409.45 v1(3807.09,1401.57)
  Bottom Layer, Bottom w7.87: D8.5@3003.94,1342.52 v1(3003.94,1484.25) 3047.24,1484.25 3062.99,1468.5 3570.87,1468.5 3598.43,1440.94 3657.48,1440.94 3696.85,1401.57 v1(3807.09,1401.57)
A1: D6.11 D7.4 D8.4 | length 1388.2
  Top Layer, Top w7.87: v1(3035.43,1452.76) D7.4@3035.43,1799.21 ; D6.11@3818.9,1460.63 3818.9,1429.13 3838.58,1409.45 v1(3838.58,1377.95)
  Bottom Layer, Bottom w7.87: D8.4@3035.43,1342.52 v1(3035.43,1452.76) 3562.99,1452.76 3645.67,1370.08 3830.71,1370.08 v1(3838.58,1377.95)
A2: D6.12 D7.3 D8.42 | length 1191.8
  Top Layer, Top w7.87: D7.3@3066.93,1799.21 v1(3066.93,1720.47) 3066.93,1657.48 3157.48,1566.93 v1(3381.89,1566.93) ; v1(3791.34,1625.98) 3838.58,1578.74 D6.12@3838.58,1460.63
  Bottom Layer, Bottom w7.87: v1(3066.93,1720.47) D8.42@3066.93,1799.21 ; v1(3381.89,1566.93) 3543.31,1566.93 3602.36,1625.98 v1(3791.34,1625.98)
A3: D6.13 D7.2 D8.43 | length 1170.9
  Top Layer, Top w7.87: D7.2@3098.43,1799.21 v1(3098.43,1748.03) 3098.43,1649.61 3153.54,1594.49 v1(3350.39,1594.49) ; v1(3834.65,1625.98) 3858.27,1602.36 D6.13@3858.27,1460.63
  Bottom Layer, Bottom w7.87: v1(3098.43,1748.03) D8.43@3098.43,1799.21 ; v1(3350.39,1594.49) 3547.24,1594.49 3594.49,1641.73 3763.78,1641.73 3775.59,1653.54 3807.09,1653.54 v1(3834.65,1625.98)
A4: D6.14 D7.1 D8.44 | length 1157.8
  Top Layer, Top w7.87: D7.1@3129.92,1799.21 3129.92,1759.84 v1(3141.73,1748.03) 3141.73,1649.61 3165.35,1625.98 v1(3381.89,1625.98) ; D6.14@3877.95,1460.63 v1(3877.95,1625.98)
  Bottom Layer, Bottom w7.87: D8.44@3129.92,1799.21 3129.92,1759.84 v1(3141.73,1748.03) ; v1(3381.89,1625.98) 3555.12,1625.98 3586.61,1657.48 3755.91,1657.48 3767.72,1669.29 3834.65,1669.29 v1(3877.95,1625.98)
A5: D6.15 D7.44 D8.1 | length 1010
  Top Layer, Top w7.87: D7.44@3129.92,1342.52 3129.92,1381.89 v1(3141.73,1393.7) ; v1(3881.89,1377.95) 3897.64,1393.7 D6.15@3897.64,1460.63
  Bottom Layer, Bottom w7.87: D8.1@3129.92,1342.52 3129.92,1381.89 v1(3141.73,1393.7) 3185.04,1437.01 3555.12,1437.01 3645.67,1346.46 3850.39,1346.46 v1(3881.89,1377.95)
A6: D6.50 D7.43 D8.2 | length 1808.4
  Top Layer, Top w7.87: D7.43@3098.43,1342.52 v1(3098.43,1393.7) 3129.92,1425.2 3393.7,1425.2 3425.2,1456.69 3425.2,1767.72 v1(3500,1842.52) ; v1(4232.28,1822.83) 4263.78,1791.34 D6.50@4385.83,1791.34
  Bottom Layer, Bottom w7.87: D8.2@3098.43,1342.52 v1(3098.43,1393.7) ; v1(3500,1842.52) 3535.43,1877.95 4141.73,1877.95 4196.85,1822.83 v1(4232.28,1822.83)
A7: D6.53 D7.42 D8.3 | length 1895.3
  Top Layer, Top w7.87: D7.42@3066.93,1342.52 v1(3066.93,1421.26) 3086.61,1440.94 3385.83,1440.94 3409.45,1464.57 3409.45,1814.96 v1(3464.57,1870.08) ; v1(4204.72,1862.2) 4216.54,1850.39 D6.53@4385.83,1850.39
  Bottom Layer, Bottom w7.87: D8.3@3066.93,1342.52 v1(3066.93,1421.26) ; v1(3464.57,1870.08) 3488.19,1893.7 4149.61,1893.7 4181.1,1862.2 v1(4204.72,1862.2)
A8: D6.54 D7.39 D8.39 | length 2179.4
  Top Layer, Top w7.87: v1(2940.94,1704.72) 2940.94,1582.68 2909.45,1551.18 2909.45,1484.25 2940.94,1452.76 2940.94,1413.39 2972.44,1381.89 D7.39@2972.44,1342.52 ; v1(4185.04,1901.57) 4208.66,1901.57 4240.16,1870.08 D6.54@4385.83,1870.08
  Mid-Layer 1, +3.3V w7.87: v1(3291.34,1952.76) 3318.9,1925.2 3350.39,1925.2 3362.2,1937.01 3929.13,1937.01 3960.63,1968.5 4141.73,1968.5 4185.04,1925.2 v1(4185.04,1901.57)
  Bottom Layer, Bottom w7.87: v1(2940.94,1704.72) 2972.44,1736.22 2972.44,1834.65 2952.76,1854.33 2952.76,1929.13 2984.25,1960.63 3279.53,1960.63 v1(3291.34,1952.76)
A9: D6.55 D7.28 D8.28 | length 2456.7
  Top Layer, Top w7.87: v1(2562.99,1704.72) 2562.99,1456.69 2625.98,1393.7 D7.28@2625.98,1342.52 ; v1(4240.16,1909.45) 4259.84,1889.76 D6.55@4385.83,1889.76
  Mid-Layer 1, +3.3V w7.87: v1(3334.65,1952.76) 3921.26,1952.76 3952.76,1984.25 4149.61,1984.25 4224.41,1909.45 v1(4240.16,1909.45)
  Bottom Layer, Bottom w7.87: v1(2562.99,1704.72) 2625.98,1767.72 D8.28@2625.98,1799.21 2625.98,1877.95 2704.72,1956.69 2803.15,1956.69 2830.71,1984.25 3303.15,1984.25 v1(3334.65,1952.76)
A10: D6.56 D7.27 D8.18 | length 2380.2
  Top Layer, Top w7.87: v1(2594.49,1291.34) D7.27@2594.49,1342.52 ; v1(4224.41,1948.82) 4240.16,1948.82 4279.53,1909.45 D6.56@4385.83,1909.45
  Bottom Layer, Bottom w7.87: v1(2594.49,1291.34) D8.18@2594.49,1342.52 2594.49,1515.75 2606.3,1527.56 3216.54,1527.56 3259.84,1570.87 3259.84,1744.09 3299.21,1783.46 3342.52,1783.46 3413.39,1854.33 3413.39,1881.89 3456.69,1925.2 3913.39,1925.2 3937.01,1948.82 v1(4224.41,1948.82)
A11: D6.57 D7.26 D8.19 | length 2373.9
  Top Layer, Top w7.87: D7.26@2562.99,1342.52 v1(2562.99,1393.7) ; v1(4200.79,1980.32) 4232.28,1980.32 4283.46,1929.13 D6.57@4385.83,1929.13
  Bottom Layer, Bottom w7.87: D8.19@2562.99,1342.52 v1(2562.99,1393.7) 2562.99,1507.87 2598.43,1543.31 3208.66,1543.31 3244.09,1578.74 3244.09,1751.97 3291.34,1799.21 3334.65,1799.21 3397.64,1862.2 3397.64,1889.76 3448.82,1940.94 3905.51,1940.94 3944.88,1980.32 v1(4200.79,1980.32)
A12: D6.87 D7.25 D8.20 | length 2429.3
  Top Layer, Top w7.87: v1(2531.5,1291.34) D7.25@2531.5,1342.52 ; D6.87@4035.43,2299.21 4035.43,2153.54 v1(4102.36,2086.61)
  Bottom Layer, Bottom w7.87: v1(2531.5,1291.34) D8.20@2531.5,1342.52 2531.5,1500 2590.55,1559.06 3196.85,1559.06 3228.35,1590.55 3228.35,1759.84 3283.46,1814.96 3326.77,1814.96 3381.89,1870.08 3381.89,1897.64 3440.94,1956.69 3897.64,1956.69 3984.25,2043.31 4059.06,2043.31 v1(4102.36,2086.61)
A13: D6.88 D7.24 D8.21 | length 2391.1
  Top Layer, Top w7.87: D7.24@2500,1342.52 v1(2500,1393.7) ; D6.88@4015.75,2299.21 4015.75,2255.91 4015.75,2149.61 4059.06,2106.3 v1(4059.06,2086.61)
  Bottom Layer, Bottom w7.87: D8.21@2500,1342.52 v1(2500,1393.7) 2500,1492.13 2582.68,1574.8 3188.98,1574.8 3212.6,1598.43 3212.6,1767.72 3275.59,1830.71 3318.9,1830.71 3366.14,1877.95 3366.14,1905.51 3503.94,2043.31 3685.04,2043.31 3748.03,2106.3 3795.28,2106.3 3842.52,2059.06 4031.5,2059.06 v1(4059.06,2086.61)
A14: D6.89 D7.23 D8.22 | length 2416
  Top Layer, Top w7.87: v1(2468.5,1291.34) D7.23@2468.5,1342.52 ; D6.89@3996.06,2299.21 3996.06,2251.97 3996.06,2145.67 4015.75,2125.98 v1(4015.75,2086.61)
  Bottom Layer, Bottom w7.87: v1(2468.5,1291.34) 2468.5,1484.25 2574.8,1590.55 3181.1,1590.55 3196.85,1606.3 3196.85,1775.59 3267.72,1846.46 3311.02,1846.46 3350.39,1885.83 3350.39,1913.39 3496.06,2059.06 3677.17,2059.06 3740.16,2122.05 3803.15,2122.05 3850.39,2074.8 4003.94,2074.8 v1(4015.75,2086.61)
A15: D6.90 D7.22 D8.23 | length 2010.2
  Top Layer, Top w7.87: D7.22@2468.5,1799.21 v1(2468.5,1850.39) 2468.5,1940.94 2527.56,2000 2763.78,2000 v1(2779.53,1984.25) ; v1(3976.38,2102.36) D6.90@3976.38,2299.21
  Bottom Layer, Bottom w7.87: D8.23@2468.5,1799.21 v1(2468.5,1850.39) ; v1(2779.53,1984.25) 2795.28,2000 3413.39,2000 3488.19,2074.8 3669.29,2074.8 3736.22,2141.73 3807.09,2141.73 3846.46,2102.36 v1(3976.38,2102.36)
A16: D6.80 D7.21 D8.24 D9.16 | length 2084.7
  Top Layer, Top w7.87: v1(2500,1748.03) D7.21@2500,1799.21 ; D6.80@4173.23,2299.21 4173.23,2263.78 v1(4185.04,2251.97)
  Bottom Layer, Bottom w7.87: v1(2500,1748.03) D8.24@2500,1799.21 2500,1897.64 2665.35,2062.99 2901.57,2062.99 3027.56,2188.98 3279.53,2188.98 3291.34,2200.79 D9.16@3334.65,2200.79 3724.41,2200.79 3748.03,2224.41 4114.17,2224.41 4141.73,2251.97 v1(4185.04,2251.97)
A17: D6.81 D7.20 D8.25 D9.17 | length 1999.9
  Top Layer, Top w7.87: D7.20@2531.5,1799.21 v1(2531.5,1850.39) ; D6.81@4153.54,2299.21 4153.54,2228.35 v1(4161.42,2220.47)
  Bottom Layer, Bottom w7.87: D8.25@2531.5,1799.21 v1(2531.5,1850.39) 2531.5,1905.51 2673.23,2047.24 2909.45,2047.24 3035.43,2173.23 3287.4,2173.23 3295.28,2181.1 D9.17@3334.65,2181.1 3728.35,2181.1 3755.91,2208.66 4149.61,2208.66 v1(4161.42,2220.47)
A18: D6.82 D7.19 D8.26 | length 2088.4
  Top Layer, Top w7.87: v1(2562.99,1748.03) D7.19@2562.99,1799.21 ; D6.82@4133.86,2299.21 4133.86,2204.72 4145.67,2192.91 v1(4192.91,2192.91)
  Bottom Layer, Bottom w7.87: v1(2562.99,1748.03) 2562.99,1858.27 2720.47,2015.75 3405.51,2015.75 3480.32,2090.55 3661.42,2090.55 3732.28,2161.42 3763.78,2192.91 v1(4192.91,2192.91)
A19: D6.2 D7.18 D8.27 | length 1535.4
  Top Layer, Top w7.87: v1(2594.49,1850.39) D7.18@2594.49,1799.21 2594.49,1527.56 v1(2622.05,1500) ; v1(3641.73,1413.39) D6.2@3641.73,1460.63
  Mid-Layer 2, GND w7.87: v1(2622.05,1500) 2645.67,1523.62 3216.54,1523.62 3326.77,1413.39 v1(3641.73,1413.39)
  Bottom Layer, Bottom w7.87: D8.27@2594.49,1799.21 v1(2594.49,1850.39)
CE2_1: D6.91 D7.40 R55.2 | length 2456.4
  Top Layer, Top w7.87: R55.2@2572.83,1212.6 2909.45,1212.6 3003.94,1307.09 D7.40@3003.94,1342.52 3003.94,1374.02 2956.69,1421.26 2956.69,1476.38 v1(2940.94,1492.13) ; D6.91@3956.69,2299.21 3956.69,2255.91 3913.39,2212.6 3913.39,2000 v1(3992.13,1921.26)
  Bottom Layer, Bottom w7.87: v1(2940.94,1492.13) 2960.63,1511.81 3224.41,1511.81 3275.59,1562.99 3275.59,1736.22 3307.09,1767.72 3350.39,1767.72 3429.13,1846.46 3429.13,1874.02 3464.57,1909.45 3980.32,1909.45 v1(3992.13,1921.26)
CE2_2: D6.92 D8.40 R56.2 | length 1359.3
  Top Layer, Top w7.87: v1(3885.83,1984.25) 3885.83,2208.66 3937.01,2259.84 D6.92@3937.01,2299.21
  Mid-Layer 1, +3.3V w7.87: v1(3051.18,1925.2) 3110.24,1984.25 3350.39,1984.25 3366.14,1968.5 3870.08,1968.5 v1(3885.83,1984.25)
  Bottom Layer, Bottom w7.87: D8.40@3003.94,1799.21 3003.94,1885.83 R56.2@3005.91,1889.76 3041.34,1925.2 v1(3051.18,1925.2)
CHRG: D1.1 D6.46 | length 3005
  Top Layer, Top w7.87: D6.46@4385.83,1712.6 5559.06,1712.6 5606.3,1759.84 5606.3,1964.57 5688.98,2047.24 6133.86,2047.24 6236.22,1944.88 6236.22,1125.98 6228.35,1118.11 D1.1@6204.72,1118.11
CLK_50M: D6.35 D11.5 D13.3 | length 2054.3
  Top Layer, Top w7.87: D6.35@4291.34,1460.63 4291.34,1421.26 4303.15,1409.45 4417.32,1409.45 4460.63,1452.76 v1(4622.05,1452.76)
  Mid-Layer 2, GND w7.87: v1(5374.02,1555.12) 5476.38,1657.48 6035.43,1657.48 v1(6043.31,1665.35)
  Bottom Layer, Bottom w7.87: v1(4622.05,1452.76) 4767.72,1452.76 ; D13.3@4767.72,1358.27 4767.72,1452.76 ; v1(5374.02,1555.12) 5255.91,1555.12 5153.54,1452.76 4767.72,1452.76 ; D11.5@5988.19,1659.45 6037.4,1659.45 v1(6043.31,1665.35)
D0: D6.85 D7.9 D8.36 D9.29 | length 2391.6
  Top Layer, Top w7.87: v1(2748.03,2094.49) 2759.84,2106.3 2759.84,2326.77 2811.02,2377.95 2929.13,2377.95 v1(2956.69,2405.51) ; D7.9@2877.95,1799.21 2877.95,1834.65 v1(2893.7,1850.39) ; v1(3799.21,2377.95) 3807.09,2377.95 3834.65,2405.51 4043.31,2405.51 4074.8,2374.02 D6.85@4074.8,2299.21
  Mid-Layer 1, +3.3V w7.87: v1(2748.03,2094.49) 2736.22,2082.68 2736.22,1976.38 2862.2,1850.39 v1(2893.7,1850.39) ; v1(2956.69,2405.51) 3169.29,2405.51 3212.6,2362.2 3381.89,2362.2 3425.2,2405.51 3771.65,2405.51 v1(3799.21,2377.95)
  Bottom Layer, Bottom w7.87: D9.29@2547.24,2122.05 2704.72,2122.05 2732.28,2094.49 v1(2748.03,2094.49) ; D8.36@2877.95,1799.21 2877.95,1834.65 v1(2893.7,1850.39)
D1: D6.86 D7.10 D8.35 D9.30 | length 2450
  Top Layer, Top w7.87: v1(2732.28,2133.86) 2744.09,2145.67 2744.09,2334.65 2814.96,2405.51 v1(2913.39,2405.51) ; v1(2846.46,1748.03) D7.10@2846.46,1799.21 ; v1(3846.46,2377.95) 3858.27,2389.76 4035.43,2389.76 4055.12,2370.08 D6.86@4055.12,2299.21
  Mid-Layer 1, +3.3V w7.87: v1(2732.28,2133.86) 2720.47,2122.05 2720.47,1968.5 2846.46,1842.52 v1(2846.46,1748.03) ; v1(2913.39,2405.51) 2944.88,2374.02 2968.5,2374.02 2984.25,2389.76 3161.42,2389.76 3204.72,2346.46 3389.76,2346.46 3433.07,2389.76 3744.09,2389.76 3787.4,2346.46 3814.96,2346.46 v1(3846.46,2377.95)
  Bottom Layer, Bottom w7.87: D9.30@2547.24,2141.73 2724.41,2141.73 v1(2732.28,2133.86) ; v1(2846.46,1748.03) D8.35@2846.46,1799.21
D2: D6.114 D7.13 D8.32 D9.31 | length 1755.8
  Top Layer, Top w7.87: v1(2751.97,1748.03) D7.13@2751.97,1799.21 ; D6.114@3547.24,2125.98 3586.61,2125.98 v1(3594.49,2118.11)
  Mid-Layer 1, +3.3V w7.87: v1(2716.54,2173.23) 2704.72,2161.42 2704.72,1960.63 2751.97,1913.39 v1(2751.97,1748.03)
  Mid-Layer 2, GND w7.87: v1(2716.54,2173.23) 2783.46,2240.16 3070.87,2240.16 3188.98,2122.05 3452.76,2122.05 3484.25,2090.55 3566.93,2090.55 v1(3594.49,2118.11)
  Bottom Layer, Bottom w7.87: D9.31@2547.24,2161.42 2704.72,2161.42 v1(2716.54,2173.23) ; v1(2751.97,1748.03) D8.32@2751.97,1799.21
D3: D6.115 D7.14 D8.31 D9.32 | length 1604.8
  Top Layer, Top w7.87: v1(2704.72,1850.39) 2720.47,1834.65 D7.14@2720.47,1799.21 ; v1(3500,2118.11) 3511.81,2106.3 D6.115@3547.24,2106.3
  Mid-Layer 1, +3.3V w7.87: v1(2700.79,2212.6) 2688.98,2200.79 2688.98,1952.76 2732.28,1909.45 2732.28,1877.95 v1(2704.72,1850.39)
  Mid-Layer 2, GND w7.87: v1(2700.79,2212.6) 2744.09,2255.91 3078.74,2255.91 3196.85,2137.8 3480.32,2137.8 v1(3500,2118.11)
  Bottom Layer, Bottom w7.87: D9.32@2547.24,2181.1 2669.29,2181.1 v1(2700.79,2212.6) ; v1(2704.72,1850.39) 2720.47,1834.65 D8.31@2720.47,1799.21
D4: D6.58 D7.31 D8.14 D9.41 | length 3254.2
  Top Layer, Top w7.87: v1(2704.72,1291.34) 2720.47,1307.09 D7.31@2720.47,1342.52 ; v1(4291.34,1960.63) 4303.15,1948.82 D6.58@4385.83,1948.82
  Mid-Layer 1, +3.3V w7.87: v1(2614.17,2330.71) 2622.05,2322.83 2622.05,1590.55 2704.72,1507.87 v1(2704.72,1291.34)
  Mid-Layer 2, GND w7.87: v1(2614.17,2330.71) 2614.17,2307.09 2637.8,2283.46 2712.6,2283.46 2744.09,2314.96 3043.31,2314.96 3204.72,2153.54 4082.68,2153.54 4232.28,2003.94 4232.28,1980.32 4251.97,1960.63 v1(4291.34,1960.63)
  Bottom Layer, Bottom w7.87: D9.41@2547.24,2358.27 2586.61,2358.27 v1(2614.17,2330.71) ; v1(2704.72,1291.34) 2720.47,1307.09 D8.14@2720.47,1342.52
D5: D6.59 D7.32 D8.13 D9.42 | length 3183.1
  Top Layer, Top w7.87: D7.32@2751.97,1342.52 v1(2751.97,1393.7) ; v1(4263.78,1992.13) 4299.21,1992.13 4322.83,1968.5 D6.59@4385.83,1968.5
  Mid-Layer 1, +3.3V w7.87: v1(2641.73,2362.2) 2641.73,1594.49 2751.97,1484.25 v1(2751.97,1393.7)
  Mid-Layer 2, GND w7.87: v1(2641.73,2362.2) 2641.73,2311.02 2653.54,2299.21 2704.72,2299.21 2736.22,2330.71 3051.18,2330.71 3212.6,2169.29 4090.55,2169.29 4263.78,1996.06 v1(4263.78,1992.13)
  Bottom Layer, Bottom w7.87: D9.42@2547.24,2377.95 2625.98,2377.95 v1(2641.73,2362.2) ; D8.13@2751.97,1342.52 v1(2751.97,1393.7)
D6: D6.60 D7.35 D8.10 D9.43 | length 3172.4
  Top Layer, Top w7.87: D7.35@2846.46,1342.52 v1(2846.46,1393.7) ; v1(4295.28,2019.68) 4326.77,1988.19 D6.60@4385.83,1988.19
  Mid-Layer 1, +3.3V w7.87: v1(2669.29,2330.71) 2657.48,2318.9 2657.48,1602.36 2846.46,1413.39 v1(2846.46,1393.7)
  Mid-Layer 2, GND w7.87: v1(2669.29,2330.71) 2712.6,2330.71 2728.35,2346.46 3059.06,2346.46 3220.47,2185.04 4098.43,2185.04 4263.78,2019.68 v1(4295.28,2019.68)
  Bottom Layer, Bottom w7.87: D9.43@2547.24,2397.64 2645.67,2397.64 2673.23,2370.08 2673.23,2334.65 v1(2669.29,2330.71) ; D8.10@2846.46,1342.52 v1(2846.46,1393.7)
D7: D6.63 D7.36 D8.9 D9.44 | length 3283.2
  Top Layer, Top w7.87: D7.36@2877.95,1342.52 2877.95,1307.09 v1(2893.7,1291.34) ; v1(4267.72,2055.12) 4275.59,2047.24 D6.63@4385.83,2047.24
  Mid-Layer 1, +3.3V w7.87: v1(2700.79,2362.2) 2700.79,2322.83 2673.23,2295.28 2673.23,1610.24 2893.7,1389.76 v1(2893.7,1291.34)
  Mid-Layer 2, GND w7.87: v1(2700.79,2362.2) 3066.93,2362.2 3228.35,2200.79 4106.3,2200.79 4251.97,2055.12 v1(4267.72,2055.12)
  Bottom Layer, Bottom w7.87: D9.44@2547.24,2417.32 2649.61,2417.32 2700.79,2366.14 v1(2700.79,2362.2) ; D8.9@2877.95,1342.52 2877.95,1307.09 v1(2893.7,1291.34)